# Altium PCB ring.PcbDoc
Units mm, origin at the board's own origin, x right, y up, seen from the top; angles counter-clockwise.
Board outline 210.25 x 210.25 mm, 2 copper layers (Top Layer, Bottom Layer); 227 components, 194 nets, 826 pads, 241 vias.
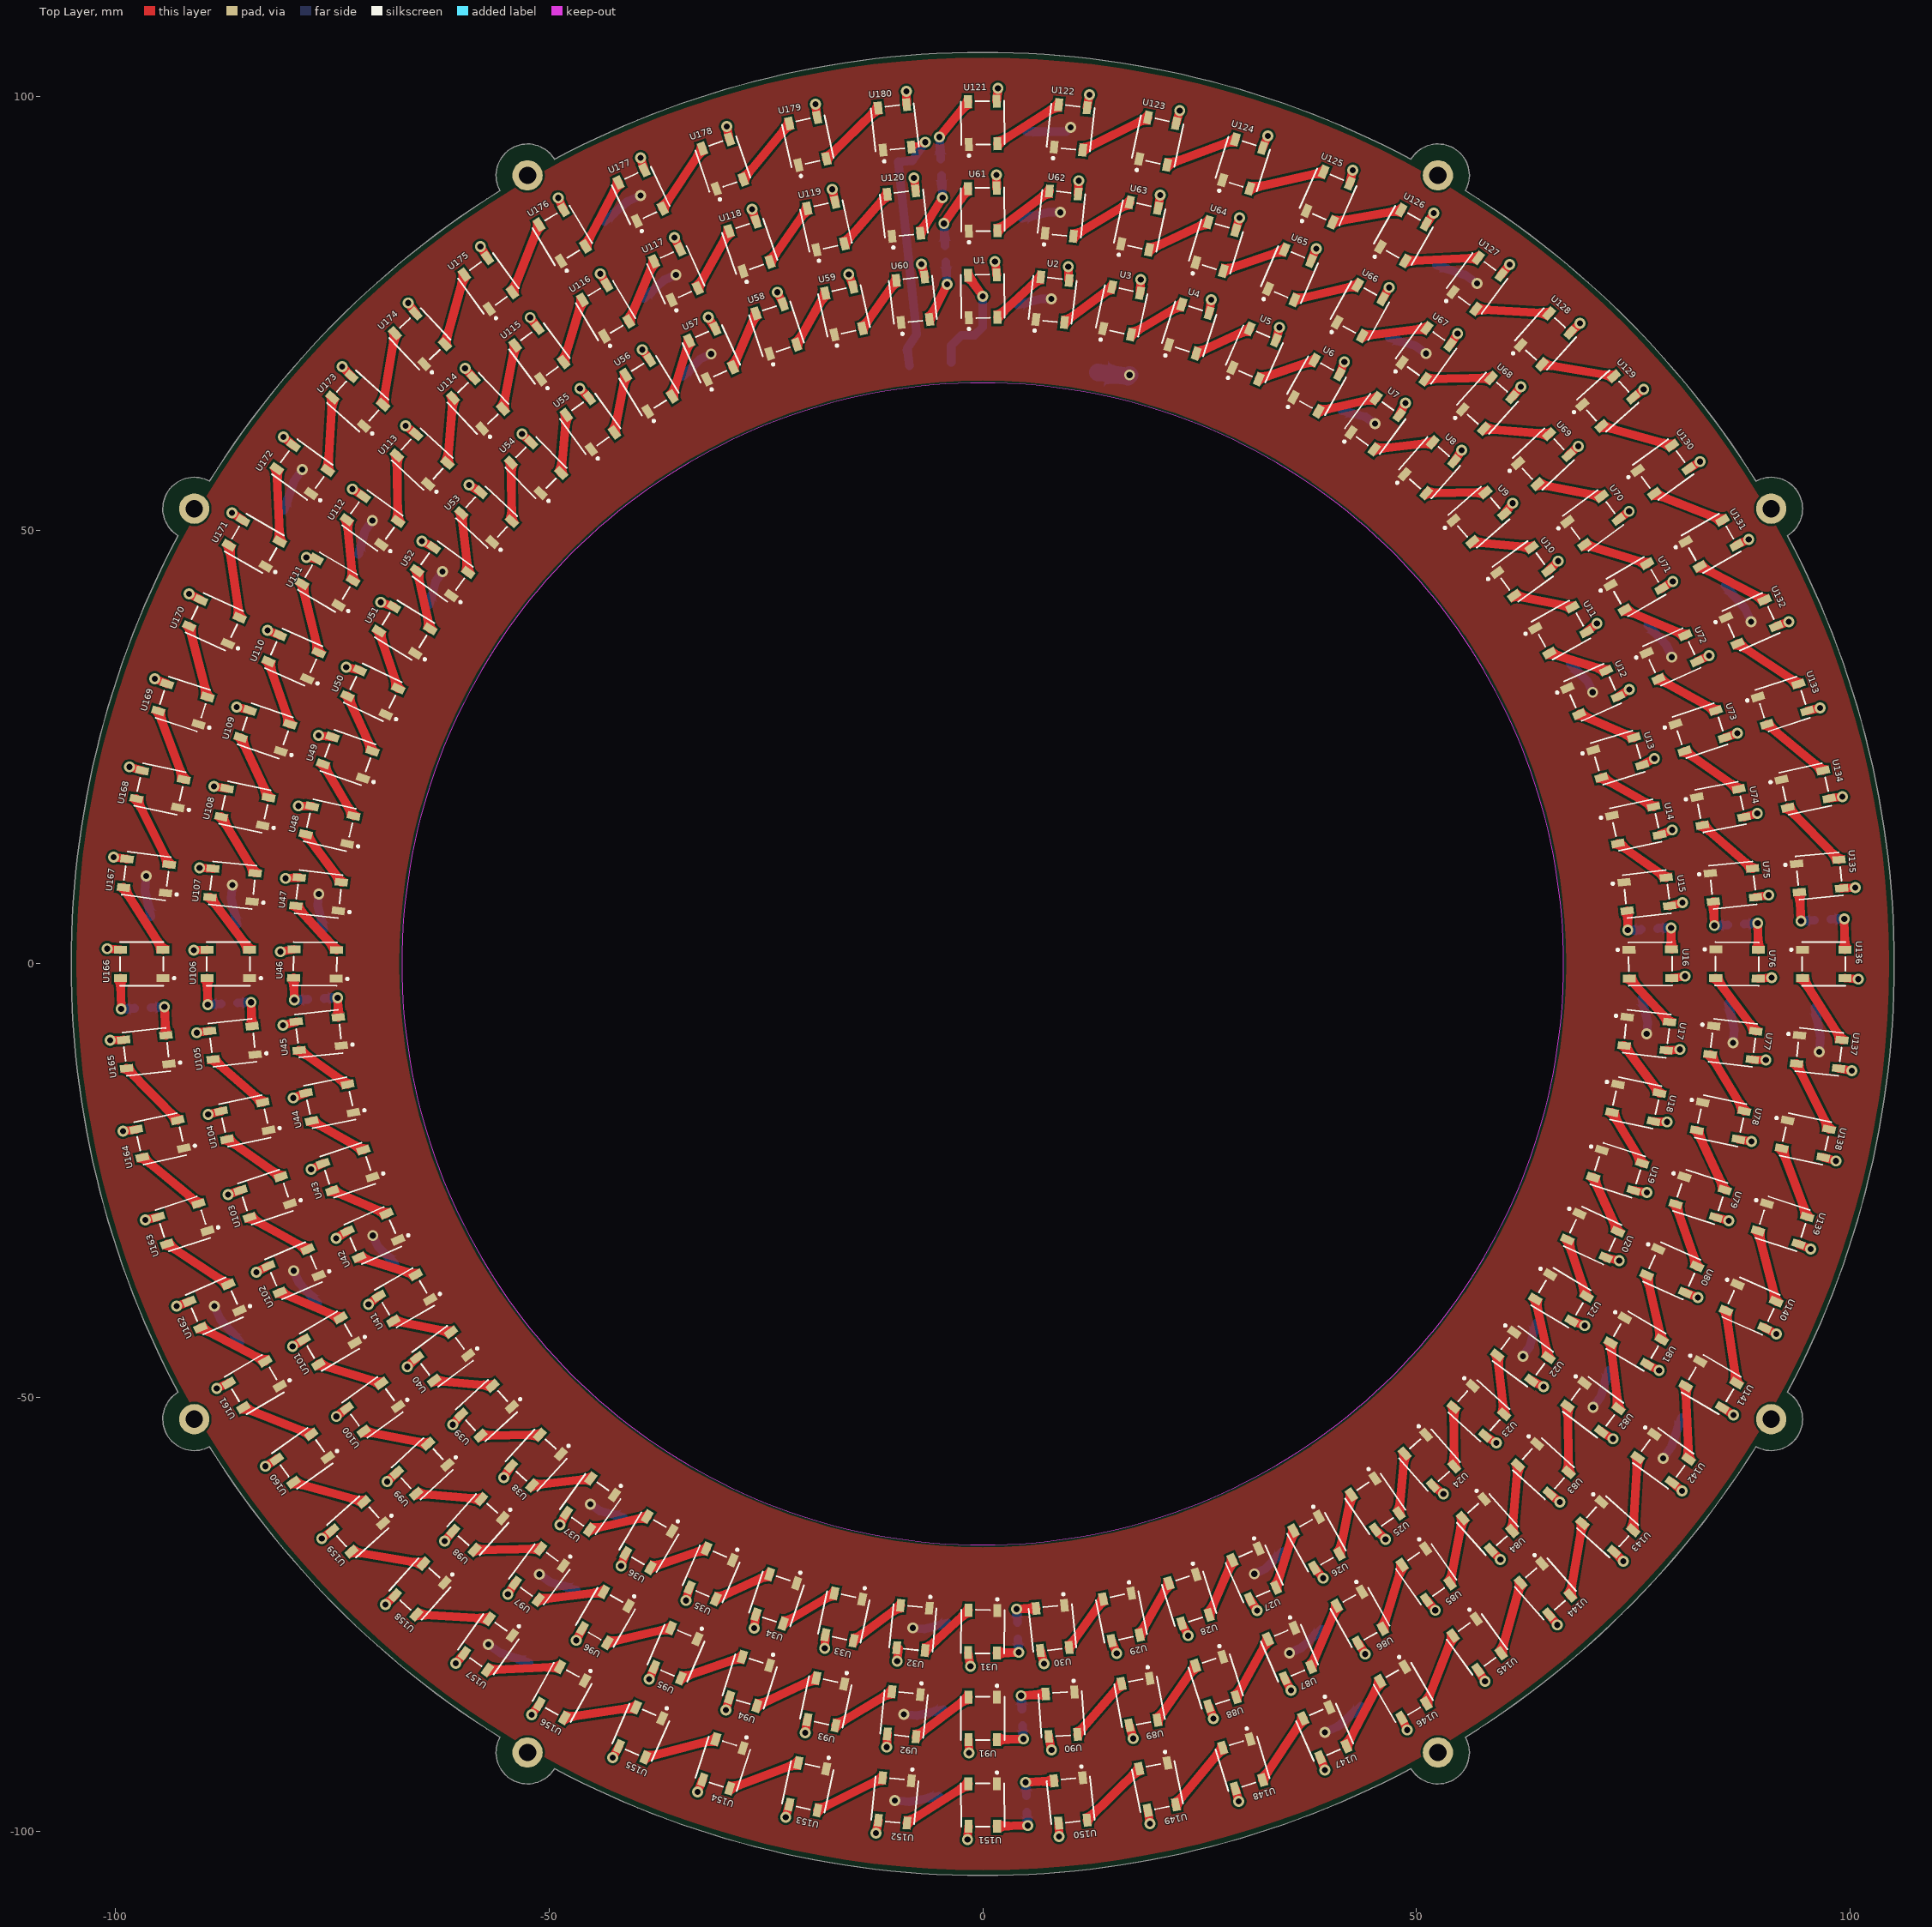
[diagram p0: Top Layer view]
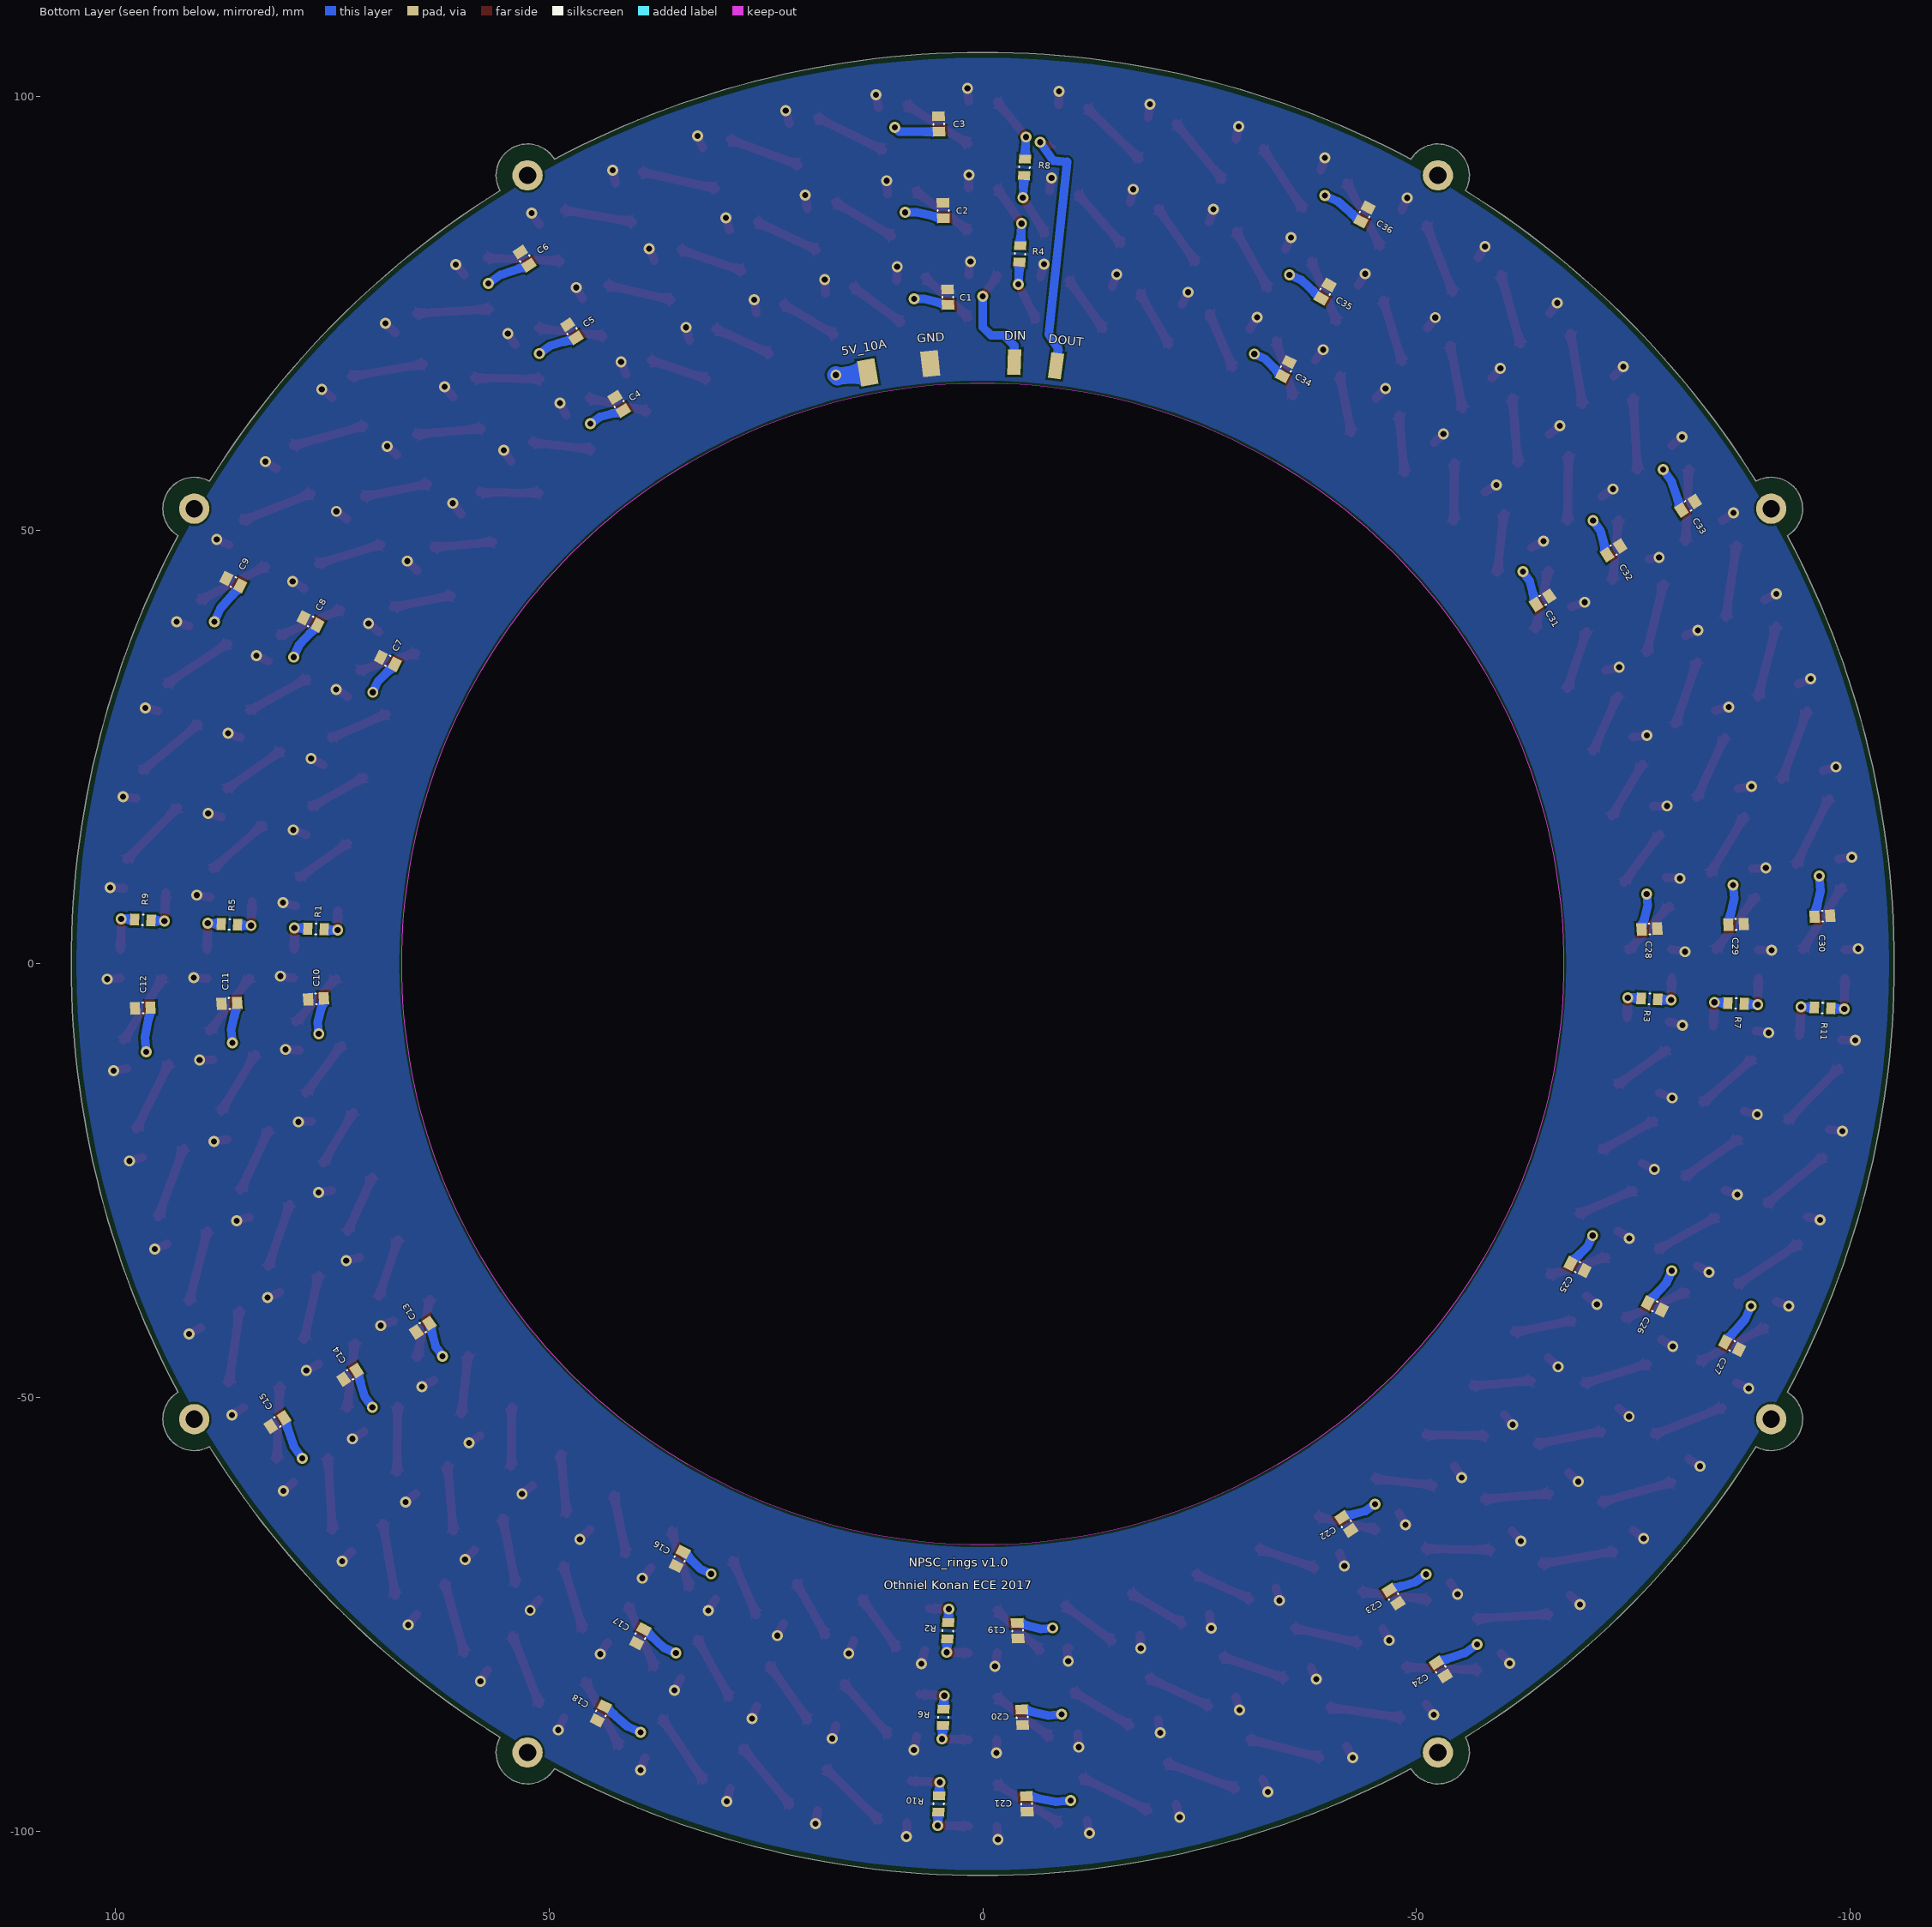
[diagram p1: Bottom Layer view, seen from below]
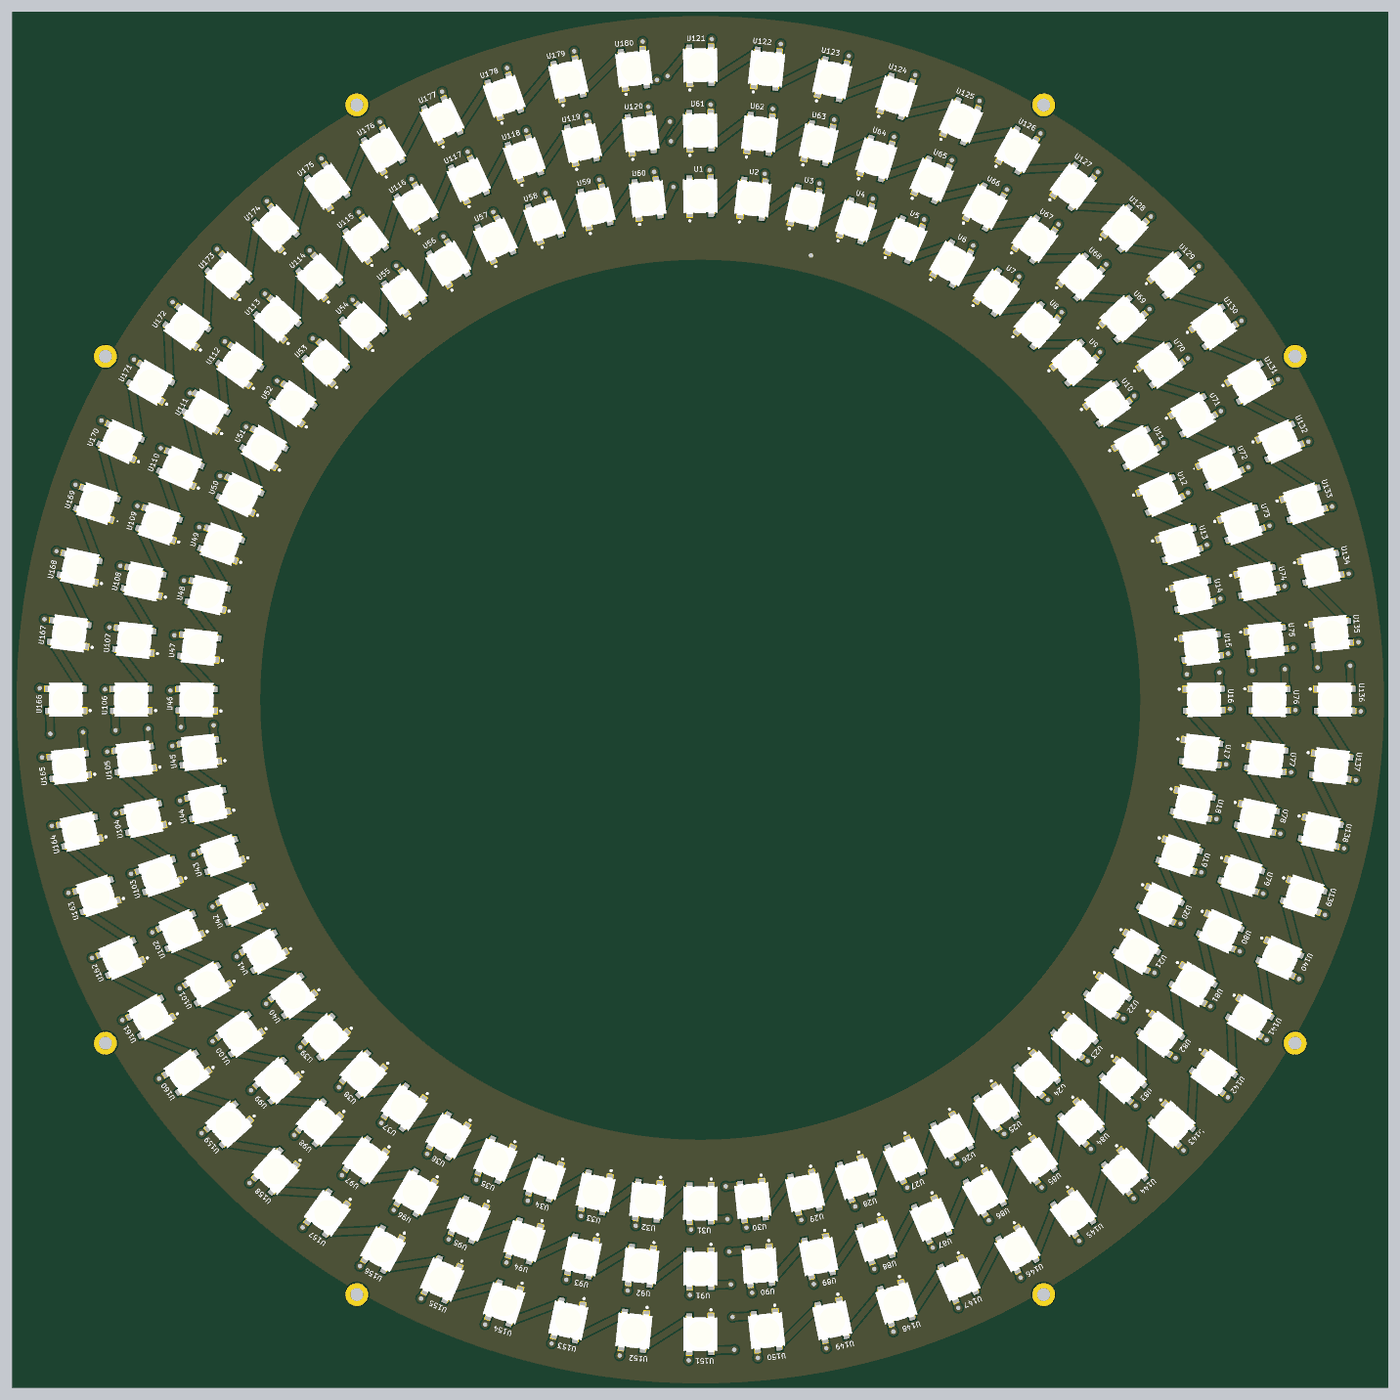
[diagram p2: 3D render of the assembled board from above, using the file's embedded part models]

## Layer stack, top to bottom
Top Solder: solder mask 0.0102, Solder Resist, Dk 3.5
Top Layer: signal copper 0.0356
Dielectric 1: dielectric 0.32, FR-4, Dk 4.8
Bottom Layer: signal copper 0.0356
Bottom Solder: solder mask 0.0102, Solder Resist, Dk 3.5

## Board outline
-55.675,-89.179 cw(c-55.564,-89.241) -55.673,-89.175 cw(c0,0) -89.175,-55.673 cw(c-90.933,-52.5) -92.802,-49.391 cw(c0,0) -92.802,49.391 cw(c-90.933,52.5) -89.179,55.675 cw(c-89.241,55.564) -89.175,55.673 cw(c0,0) -55.673,89.175 cw(c-55.564,89.241) -55.675,89.179 cw(c-52.5,90.933) -49.392,92.802 -49.391,92.802 cw(c0,0) 49.391,92.802 cw(c52.5,90.933) 56.127,90.933 cw(c52.5,90.933) 55.673,89.175 cw(c0,0) 89.175,55.673 cw(c90.933,52.5) 94.56,52.5 cw(c90.933,52.5) 92.802,49.391 cw(c0,0) 105.127,0 cw(c0,0) 92.802,-49.391 cw(c90.933,-52.5) 94.56,-52.5 cw(c90.933,-52.5) 89.169,-55.67 cw(c89.045,-55.642) 89.153,-55.709 cw(c0,0) 55.673,-89.175 cw(c52.5,-90.933) 56.127,-90.933 cw(c52.5,-90.933) 49.391,-92.802 cw(c0,0) -49.391,-92.802 cw(c-52.5,-90.933)
cut-out: -67,0 ccw(c0,0) 0,-67 ccw(c0,0) 67,0 ccw(c0,0) 0,67 ccw(c0,0)

## Design rules (kind name [scope] priority, off if disabled: settings)
Clearance Clearance_1 [InNamedPolygon('GND_L02_P023')] p1: gap=0.5 ignorepadtopadclearanceinfootprint=FALSE except(0: Arc-Hole Track-Hole SMDPad-Hole THPad-Hole Via-Hole Fill-Hole Poly-Hole Region-Hole Text-Hole)
Clearance [All] p2: gap=0.254 ignorepadtopadclearanceinfootprint=FALSE except(0: Arc-Hole Track-Hole SMDPad-Hole THPad-Hole Via-Hole Fill-Hole Poly-Hole Region-Hole Text-Hole)
PolygonConnect PolygonConnect_2 [All vs IsNamedPolygon('GND_L02_P023')] p1: connectstyle=Relief reliefconductorwidth=0.254 reliefentries=4 polygonreliefangle="45 Angle" airgapwidth=0.254
PolygonConnect PolygonConnect_1 [All vs IsNamedPolygon('GND_L02_P023')] p2: connectstyle=Relief reliefconductorwidth=0.254 reliefentries=4 polygonreliefangle="45 Angle" airgapwidth=0.254
PolygonConnect [All] p3: connectstyle=Direct reliefconductorwidth=0.254 reliefentries=4 polygonreliefangle="45 Angle" airgapwidth=0.254
RoomDefinition ring [InComponentClass('ring')] p1: confinementstyle=ConfineIn formatcopy=TRUE lockcomponents=FALSE outline -160,-154 156,-154 156,155 -160,155
RoutingVias [All] p1: holewidth=0.711 width=1.27 viastyle="Through Hole" minholewidth=0.711 minwidth=1.27 maxholewidth=0.711 maxwidth=1.27
SolderMaskExpansion [All] p1: expansion=0.102
Width [All] p1: maxlimit=4 minlimit=0.5 preferedwidth=1
30 further rules are at their usual default settings.

## Components (designator, comment, footprint, x,y, rotation, side; value= is the part's Value field where it differs from the comment)
C1 "100nF" CAPC0805(2012)100_N 4.03,76.894 r268.52 bottom
C2 "100nF" CAPC0805(2012)100_N 4.553,86.881 r268.5 bottom
C3 "100nF" CAPC0805(2012)100_N 5.077,96.867 r267.82 bottom
C4 "100nF" CAPC0805(2012)100_N 41.937,64.578 r238.24 bottom
C5 "100nF" CAPC0805(2012)100_N 47.384,72.964 r237.37 bottom
C6 "100nF" CAPC0805(2012)100_N 52.83,81.351 r236.78 bottom
C7 "100nF" CAPC0805(2012)100_N 68.608,34.957 r207.27 bottom
C8 "100nF" CAPC0805(2012)100_N 77.518,39.497 r207.5 bottom
C9 "100nF" CAPC0805(2012)100_N 86.428,44.037 r206.99 bottom
C10 "100nF" CAPC0805(2012)100_N 76.894,-4.03 r176.74 bottom
C11 "100nF" CAPC0805(2012)100_N 86.881,-4.553 r176.85 bottom
C12 "100nF" CAPC0805(2012)100_N 96.867,-5.077 r177.57 bottom
C13 "100nF" CAPC0805(2012)100_N 64.578,-41.937 r146.45 bottom
C14 "100nF" CAPC0805(2012)100_N 72.964,-47.384 r146.99 bottom
C15 "100nF" CAPC0805(2012)100_N 81.351,-52.83 r146.77 bottom
C16 "100nF" CAPC0805(2012)100_N 34.957,-68.608 r117.27 bottom
C17 "100nF" CAPC0805(2012)100_N 39.497,-77.518 r117.3 bottom
C18 "100nF" CAPC0805(2012)100_N 44.037,-86.428 r116.79 bottom
C19 "100nF" CAPC0805(2012)100_N -4.03,-76.894 r87.22 bottom
C20 "100nF" CAPC0805(2012)100_N -4.553,-86.881 r87.17 bottom
C21 "100nF" CAPC0805(2012)100_N -5.077,-96.867 r87.39 bottom
C22 "100nF" CAPC0805(2012)100_N -41.937,-64.578 r56.43 bottom
C23 "100nF" CAPC0805(2012)100_N -47.384,-72.964 r56.98 bottom
C24 "100nF" CAPC0805(2012)100_N -52.83,-81.351 r57.04 bottom
C25 "100nF" CAPC0805(2012)100_N -68.608,-34.957 r27.1 bottom
C26 "100nF" CAPC0805(2012)100_N -77.518,-39.497 r27.17 bottom
C27 "100nF" CAPC0805(2012)100_N -86.428,-44.037 r27.5 bottom
C28 "100nF" CAPC0805(2012)100_N -76.894,4.03 r356.81 bottom
C29 "100nF" CAPC0805(2012)100_N -86.881,4.553 r357.7 bottom
C30 "100nF" CAPC0805(2012)100_N -96.844,5.499 r356.71 bottom
C31 "100nF" CAPC0805(2012)100_N -64.578,41.937 r327.04 bottom
C32 "100nF" CAPC0805(2012)100_N -72.757,47.702 r326.59 bottom
C33 "100nF" CAPC0805(2012)100_N -81.351,52.83 r327.19 bottom
C34 "100nF" CAPC0805(2012)100_N -34.957,68.608 r296.76 bottom
C35 "100nF" CAPC0805(2012)100_N -39.497,77.518 r299.83 bottom
C36 "100nF" CAPC0805(2012)100_N -44.037,86.428 r296.96 bottom
R1 "Jumper 0805(2012)" RESC0805(2012)_N 76.894,4.03 r182.19 bottom
R2 "Jumper 0805(2012)" RESC0805(2012)_N 4.03,-76.894 r92.52 bottom
R3 "Jumper 0805(2012)" RESC0805(2012)_N -76.894,-4.03 r3.18 bottom
R4 "Jumper 0805(2012)" RESC0805(2012)_N -4.292,81.888 r93 bottom
R5 "Jumper 0805(2012)" RESC0805(2012)_N 86.881,4.553 r182.47 bottom
R6 "Jumper 0805(2012)" RESC0805(2012)_N 4.553,-86.881 r91.98 bottom
R7 "Jumper 0805(2012)" RESC0805(2012)_N -86.881,-4.553 r2.5 bottom
R8 "Jumper 0805(2012)" RESC0805(2012)_N -4.815,91.874 r93 bottom
R9 "Jumper 0805(2012)" RESC0805(2012)_N 96.867,5.077 r183 bottom
R10 "Jumper 0805(2012)" RESC0805(2012)_N 5.077,-96.867 r92.02 bottom
R11 "Jumper 0805(2012)" RESC0805(2012)_N -96.867,-5.077 r2.68 bottom
U1 "WS2812B" ADAI-WS2812B_V 0,77 r90.93 top
U2 "WS2812B" ADAI-WS2812B_V 8.049,76.578 r83.5 top
U3 "WS2812B" ADAI-WS2812B_V 16.009,75.317 r77.81 top
U4 "WS2812B" ADAI-WS2812B_V 23.794,73.231 r72.15 top
U5 "WS2812B" ADAI-WS2812B_V 31.319,70.343 r66.14 top
U6 "WS2812B" ADAI-WS2812B_V 38.5,66.684 r60.53 top
U7 "WS2812B" ADAI-WS2812B_V 45.259,62.294 r53.69 top
U8 "WS2812B" ADAI-WS2812B_V 51.523,57.222 r48.64 top
U9 "WS2812B" ADAI-WS2812B_V 57.222,51.523 r41.12 top
U10 "WS2812B" ADAI-WS2812B_V 62.294,45.259 r36.08 top
U11 "WS2812B" ADAI-WS2812B_V 66.684,38.5 r29.43 top
U12 "WS2812B" ADAI-WS2812B_V 70.343,31.319 r24.13 top
U13 "WS2812B" ADAI-WS2812B_V 73.231,23.794 r16.94 top
U14 "WS2812B" ADAI-WS2812B_V 75.317,16.009 r11.74 top
U15 "WS2812B" ADAI-WS2812B_V 76.578,8.049 r6.5 top
U16 "WS2812B" ADAI-WS2812B_V 77,0 r0.5 top
U17 "WS2812B" ADAI-WS2812B_V 76.578,-8.049 r353.5 top
U18 "WS2812B" ADAI-WS2812B_V 75.317,-16.009 r348 top
U19 "WS2812B" ADAI-WS2812B_V 73.231,-23.794 r342 top
U20 "WS2812B" ADAI-WS2812B_V 70.343,-31.319 r335 top
U21 "WS2812B" ADAI-WS2812B_V 66.684,-38.5 r329 top
U22 "WS2812B" ADAI-WS2812B_V 62.294,-45.259 r323.5 top
U23 "WS2812B" ADAI-WS2812B_V 57.222,-51.523 r318 top
U24 "WS2812B" ADAI-WS2812B_V 51.523,-57.222 r311.5 top
U25 "WS2812B" ADAI-WS2812B_V 45.259,-62.294 r304.5 top
U26 "WS2812B" ADAI-WS2812B_V 38.5,-66.684 r299 top
U27 "WS2812B" ADAI-WS2812B_V 31.319,-70.343 r294 top
U28 "WS2812B" ADAI-WS2812B_V 23.794,-73.231 r287.5 top
U29 "WS2812B" ADAI-WS2812B_V 16.009,-75.317 r281.5 top
U30 "WS2812B" ADAI-WS2812B_V 8.049,-76.578 r276 top
U31 "WS2812B" ADAI-WS2812B_V 0,-77 r269.5 top
U32 "WS2812B" ADAI-WS2812B_V -8.049,-76.578 r264.5 top
U33 "WS2812B" ADAI-WS2812B_V -16.009,-75.317 r258 top
U34 "WS2812B" ADAI-WS2812B_V -23.794,-73.231 r251.5 top
U35 "WS2812B" ADAI-WS2812B_V -31.319,-70.343 r246.5 top
U36 "WS2812B" ADAI-WS2812B_V -38.5,-66.684 r239.5 top
U37 "WS2812B" ADAI-WS2812B_V -45.259,-62.294 r234.5 top
U38 "WS2812B" ADAI-WS2812B_V -51.523,-57.222 r227.5 top
U39 "WS2812B" ADAI-WS2812B_V -57.222,-51.523 r222.5 top
U40 "WS2812B" ADAI-WS2812B_V -62.294,-45.259 r216.77 top
U41 "WS2812B" ADAI-WS2812B_V -66.684,-38.5 r210 top
U42 "WS2812B" ADAI-WS2812B_V -70.343,-31.319 r204 top
U43 "WS2812B" ADAI-WS2812B_V -73.231,-23.794 r198.5 top
U44 "WS2812B" ADAI-WS2812B_V -75.317,-16.009 r191.5 top
U45 "WS2812B" ADAI-WS2812B_V -76.578,-8.049 r186 top
U46 "WS2812B" ADAI-WS2812B_V -77,0 r179 top
U47 "WS2812B" ADAI-WS2812B_V -76.578,8.049 r173.5 top
U48 "WS2812B" ADAI-WS2812B_V -75.317,16.009 r167 top
U49 "WS2812B" ADAI-WS2812B_V -73.231,23.794 r160.5 top
U50 "WS2812B" ADAI-WS2812B_V -70.343,31.319 r154.5 top
U51 "WS2812B" ADAI-WS2812B_V -66.684,38.5 r148.5 top
U52 "WS2812B" ADAI-WS2812B_V -62.294,45.259 r144 top
U53 "WS2812B" ADAI-WS2812B_V -57.222,51.523 r137 top
U54 "WS2812B" ADAI-WS2812B_V -51.523,57.222 r134.5 top
U55 "WS2812B" ADAI-WS2812B_V -45.259,62.294 r126 top
U56 "WS2812B" ADAI-WS2812B_V -38.5,66.684 r121.5 top
U57 "WS2812B" ADAI-WS2812B_V -31.319,70.343 r114.5 top
U58 "WS2812B" ADAI-WS2812B_V -23.794,73.231 r108.5 top
U59 "WS2812B" ADAI-WS2812B_V -16.009,75.317 r102.5 top
U60 "WS2812B" ADAI-WS2812B_V -8.049,76.578 r96.5 top
U61 "WS2812B" ADAI-WS2812B_V 0,87 r91 top
U62 "WS2812B" ADAI-WS2812B_V 9.094,86.523 r84 top
U63 "WS2812B" ADAI-WS2812B_V 18.088,85.099 r78 top
U64 "WS2812B" ADAI-WS2812B_V 26.884,82.742 r73 top
U65 "WS2812B" ADAI-WS2812B_V 35.386,79.478 r67 top
U66 "WS2812B" ADAI-WS2812B_V 43.5,75.344 r61 top
U67 "WS2812B" ADAI-WS2812B_V 51.137,70.384 r54 top
U68 "WS2812B" ADAI-WS2812B_V 58.214,64.654 r48 top
U69 "WS2812B" ADAI-WS2812B_V 64.654,58.214 r43 top
U70 "WS2812B" ADAI-WS2812B_V 70.384,51.137 r36.5 top
U71 "WS2812B" ADAI-WS2812B_V 75.344,43.5 r30 top
U72 "WS2812B" ADAI-WS2812B_V 79.478,35.386 r24.5 top
U73 "WS2812B" ADAI-WS2812B_V 82.742,26.884 r18.5 top
U74 "WS2812B" ADAI-WS2812B_V 85.099,18.088 r11 top
U75 "WS2812B" ADAI-WS2812B_V 86.523,9.094 r6 top
U76 "WS2812B" ADAI-WS2812B_V 87,0 r359.5 top
U77 "WS2812B" ADAI-WS2812B_V 86.523,-9.094 r353 top
U78 "WS2812B" ADAI-WS2812B_V 85.099,-18.088 r348 top
U79 "WS2812B" ADAI-WS2812B_V 82.742,-26.884 r342 top
U80 "WS2812B" ADAI-WS2812B_V 79.478,-35.386 r335.75 top
U81 "WS2812B" ADAI-WS2812B_V 75.344,-43.5 r329.5 top
U82 "WS2812B" ADAI-WS2812B_V 70.384,-51.137 r323 top
U83 "WS2812B" ADAI-WS2812B_V 64.654,-58.214 r318 top
U84 "WS2812B" ADAI-WS2812B_V 58.214,-64.654 r311.5 top
U85 "WS2812B" ADAI-WS2812B_V 51.137,-70.384 r305 top
U86 "WS2812B" ADAI-WS2812B_V 43.5,-75.344 r299.43 top
U87 "WS2812B" ADAI-WS2812B_V 35.386,-79.478 r293 top
U88 "WS2812B" ADAI-WS2812B_V 26.884,-82.742 r288 top
U89 "WS2812B" ADAI-WS2812B_V 18.088,-85.099 r280.5 top
U90 "WS2812B" ADAI-WS2812B_V 9.094,-86.523 r274 top
U91 "WS2812B" ADAI-WS2812B_V 0,-87 r270 top
U92 "WS2812B" ADAI-WS2812B_V -9.094,-86.523 r264.03 top
U93 "WS2812B" ADAI-WS2812B_V -18.088,-85.099 r258 top
U94 "WS2812B" ADAI-WS2812B_V -26.884,-82.742 r252.5 top
U95 "WS2812B" ADAI-WS2812B_V -35.386,-79.478 r247 top
U96 "WS2812B" ADAI-WS2812B_V -43.5,-75.344 r240 top
U97 "WS2812B" ADAI-WS2812B_V -51.137,-70.384 r233.5 top
U98 "WS2812B" ADAI-WS2812B_V -58.214,-64.654 r228.5 top
U99 "WS2812B" ADAI-WS2812B_V -64.654,-58.214 r222.5 top
U100 "WS2812B" ADAI-WS2812B_V -70.384,-51.137 r216 top
U101 "WS2812B" ADAI-WS2812B_V -75.344,-43.5 r210.5 top
U102 "WS2812B" ADAI-WS2812B_V -79.478,-35.386 r203 top
U103 "WS2812B" ADAI-WS2812B_V -82.742,-26.884 r198.5 top
U104 "WS2812B" ADAI-WS2812B_V -85.099,-18.088 r192 top
U105 "WS2812B" ADAI-WS2812B_V -86.523,-9.094 r186.5 top
U106 "WS2812B" ADAI-WS2812B_V -87,0 r180 top
U107 "WS2812B" ADAI-WS2812B_V -86.523,9.094 r174 top
U108 "WS2812B" ADAI-WS2812B_V -85.099,18.088 r168 top
U109 "WS2812B" ADAI-WS2812B_V -82.742,26.884 r161 top
U110 "WS2812B" ADAI-WS2812B_V -79.478,35.386 r156 top
U111 "WS2812B" ADAI-WS2812B_V -75.571,44.031 r149.5 top
U112 "WS2812B" ADAI-WS2812B_V -70.384,51.137 r144 top
U113 "WS2812B" ADAI-WS2812B_V -64.654,58.214 r137.5 top
U114 "WS2812B" ADAI-WS2812B_V -58.214,64.654 r133.5 top
U115 "WS2812B" ADAI-WS2812B_V -51.137,70.384 r127 top
U116 "WS2812B" ADAI-WS2812B_V -43.5,75.344 r121 top
U117 "WS2812B" ADAI-WS2812B_V -35.386,79.478 r114.5 top
U118 "WS2812B" ADAI-WS2812B_V -26.884,82.742 r109 top
U119 "WS2812B" ADAI-WS2812B_V -18.088,85.099 r102.5 top
U120 "WS2812B" ADAI-WS2812B_V -9.094,86.523 r96.5 top
U121 "WS2812B" ADAI-WS2812B_V 0,97 r91 top
U122 "WS2812B" ADAI-WS2812B_V 10.139,96.469 r84 top
U123 "WS2812B" ADAI-WS2812B_V 20.167,94.88 r78 top
U124 "WS2812B" ADAI-WS2812B_V 29.975,92.252 r72.5 top
U125 "WS2812B" ADAI-WS2812B_V 39.84,88.441 r66.25 top
U126 "WS2812B" ADAI-WS2812B_V 48.5,84.004 r60.5 top
U127 "WS2812B" ADAI-WS2812B_V 57.015,78.475 r53.5 top
U128 "WS2812B" ADAI-WS2812B_V 64.906,72.085 r48 top
U129 "WS2812B" ADAI-WS2812B_V 72.085,64.906 r42 top
U130 "WS2812B" ADAI-WS2812B_V 78.475,57.015 r36 top
U131 "WS2812B" ADAI-WS2812B_V 84.004,48.5 r30 top
U132 "WS2812B" ADAI-WS2812B_V 88.614,39.453 r24.11 top
U133 "WS2812B" ADAI-WS2812B_V 92.252,29.975 r18 top
U134 "WS2812B" ADAI-WS2812B_V 94.88,20.167 r12.5 top
U135 "WS2812B" ADAI-WS2812B_V 96.469,10.139 r5.5 top
U136 "WS2812B" ADAI-WS2812B_V 97,0 r0 top
U137 "WS2812B" ADAI-WS2812B_V 96.469,-10.139 r353.5 top
U138 "WS2812B" ADAI-WS2812B_V 94.88,-20.167 r348 top
U139 "WS2812B" ADAI-WS2812B_V 92.252,-29.975 r342 top
U140 "WS2812B" ADAI-WS2812B_V 88.614,-39.453 r335.99 top
U141 "WS2812B" ADAI-WS2812B_V 84.004,-48.5 r329.5 top
U142 "WS2812B" ADAI-WS2812B_V 78.475,-57.015 r324 top
U143 "WS2812B" ADAI-WS2812B_V 72.085,-64.906 r318 top
U144 "WS2812B" ADAI-WS2812B_V 64.906,-72.085 r311.5 top
U145 "WS2812B" ADAI-WS2812B_V 57.015,-78.475 r306 top
U146 "WS2812B" ADAI-WS2812B_V 48.5,-84.004 r300.24 top
U147 "WS2812B" ADAI-WS2812B_V 39.453,-88.614 r293.5 top
U148 "WS2812B" ADAI-WS2812B_V 29.975,-92.252 r287 top
U149 "WS2812B" ADAI-WS2812B_V 20.167,-94.88 r281.5 top
U150 "WS2812B" ADAI-WS2812B_V 10.139,-96.469 r276 top
U151 "WS2812B" ADAI-WS2812B_V 0,-97 r270.11 top
U152 "WS2812B" ADAI-WS2812B_V -10.139,-96.469 r264.28 top
U153 "WS2812B" ADAI-WS2812B_V -20.167,-94.88 r258 top
U154 "WS2812B" ADAI-WS2812B_V -29.975,-92.252 r252 top
U155 "WS2812B" ADAI-WS2812B_V -39.453,-88.614 r246.5 top
U156 "WS2812B" ADAI-WS2812B_V -48.5,-84.004 r241 top
U157 "WS2812B" ADAI-WS2812B_V -57.015,-78.475 r234.5 top
U158 "WS2812B" ADAI-WS2812B_V -64.906,-72.085 r228 top
U159 "WS2812B" ADAI-WS2812B_V -72.085,-64.906 r222 top
U160 "WS2812B" ADAI-WS2812B_V -78.475,-57.015 r215.5 top
U161 "WS2812B" ADAI-WS2812B_V -84.004,-48.5 r210.5 top
U162 "WS2812B" ADAI-WS2812B_V -88.614,-39.453 r203.5 top
U163 "WS2812B" ADAI-WS2812B_V -92.252,-29.975 r198 top
U164 "WS2812B" ADAI-WS2812B_V -94.88,-20.167 r192.5 top
U165 "WS2812B" ADAI-WS2812B_V -96.469,-10.139 r186 top
U166 "WS2812B" ADAI-WS2812B_V -97,0 r180 top
U167 "WS2812B" ADAI-WS2812B_V -96.469,10.139 r172.5 top
U168 "WS2812B" ADAI-WS2812B_V -94.88,20.167 r168 top
U169 "WS2812B" ADAI-WS2812B_V -92.252,29.975 r162 top
U170 "WS2812B" ADAI-WS2812B_V -88.614,39.453 r155.5 top
U171 "WS2812B" ADAI-WS2812B_V -84.004,48.5 r150 top
U172 "WS2812B" ADAI-WS2812B_V -78.475,57.015 r144 top
U173 "WS2812B" ADAI-WS2812B_V -72.085,64.906 r138 top
U174 "WS2812B" ADAI-WS2812B_V -64.906,72.085 r133.5 top
U175 "WS2812B" ADAI-WS2812B_V -57.015,78.475 r126 top
U176 "WS2812B" ADAI-WS2812B_V -48.5,84.004 r121 top
U177 "WS2812B" ADAI-WS2812B_V -39.453,88.614 r115.5 top
U178 "WS2812B" ADAI-WS2812B_V -29.975,92.252 r109 top
U179 "WS2812B" ADAI-WS2812B_V -20.167,94.88 r102.5 top
U180 "WS2812B" ADAI-WS2812B_V -10.139,96.469 r96.5 top

## Footprints (in the part's own frame and the unit in brackets; to place one, negate y for a bottom-side part, rotate by r counter-clockwise, add the part's x,y. Pads: shape width x height; smd on the part's side, far side on the other; paste and mask are expansions set on the pad)
ADAI-WS2812B_V [mm] "SMD, 4-Leads, Body 5x5mm, Pitch 3.3mm"
  rect 1.5x0.9 smd: 1(-2.45,1.65) 2(-2.45,-1.65) 3(2.45,-1.65) 4(2.45,1.65)
  silkscreen extent -3.87,-2.5 2.5,2.5, body extent -2.7,-2.5 2.7,2.5, height 1.69
CAPC0805(2012)100_N [mm] "Chip Capacitor, Body 2.0x1.2mm, Height 1.0mm, IPC Medium Density"
  rect 1.15x1.45 smd: 1(-0.9,0) 2(0.9,0)
  silkscreen extent -0.05,-0.63 0.05,0.63, body extent -1.1,-0.73 1.1,0.73, height 1
RESC0805(2012)_N [mm] "Chip Resistor, Body 2.0x1.3mm, IPC Medium Density"
  rect 1.05x1.4 smd: 1(-0.95,0) 2(0.95,0)
  silkscreen extent -0.05,-0.6 0.05,0.6, body extent -1.1,-0.67 1.1,0.68, height 0.7

## Part data
C1 C2 C3 C4 C5 C6 C7 C8 C9 C10 C11 C12 C13 C14 C15 C16 C17 C18 C19 C20 C21 C22 C23 C24 C25 C26 C27 C28 C29 C30 C31 C32 C33 C34 C35 C36: library part CMP-1036-04396-1, "CAP 100nF 10V ±20% 0805 (2012 Metric) Thickness 1mm SMD"
R1 R2 R3 R4 R5 R6 R7 R8 R9 R10 R11: library part CMP-1013-00001-1, "Jumper 0805 (2012 Metric)"
U1 U2 U3 U4 U5 U6 U7 U8 U9 U10 U11 U12 U13 U14 U15 U16 U17 U18 U19 U20 U21 U22 U23 U24 U25 U26 U27 U28 U29 U30 U31 U32 U33 U34 U35 U36 U37 U38 U39 U40 U41 U42 U43 U44 U45 U46 U47 U48 U49 U50 U51 U52 U53 U54 U55 U56 U57 U58 U59 U60 U61 U62 U63 U64 U65 U66 U67 U68 U69 U70 U71 U72 U73 U74 U75 U76 U77 U78 U79 U80 U81 U82 U83 U84 U85 U86 U87 U88 U89 U90 U91 U92 U93 U94 U95 U96 U97 U98 U99 U100 U101 U102 U103 U104 U105 U106 U107 U108 U109 U110 U111 U112 U113 U114 U115 U116 U117 U118 U119 U120 U121 U122 U123 U124 U125 U126 U127 U128 U129 U130 U131 U132 U133 U134 U135 U136 U137 U138 U139 U140 U141 U142 U143 U144 U145 U146 U147 U148 U149 U150 U151 U152 U153 U154 U155 U156 U157 U158 U159 U160 U161 U162 U163 U164 U165 U166 U167 U168 U169 U170 U171 U172 U173 U174 U175 U176 U177 U178 U179 U180: library part CMP-1740-00005-1, "Intelligent Control LED Integrated Light Source, 3.5 to 5.3 V, -25 to 80 degC, 4-Pin SMD, RoHS, Bulk"

## Free pads (board coordinates)
  rect 3x2 smd far side rot 80: 1(13.261,68.223)
  round 3.5 hole 2: 1(52.5,90.933) 2(90.933,52.5) 3(90.933,-52.5) 4(52.5,-90.933) 5(-52.5,-90.933) 6(-90.933,-52.5) 7(-90.933,52.5) 8(-52.5,90.933)
  rect 3x2 smd far side rot 84: 2(6.057,69.236)
  rect 3x1.5 smd far side rot 92: 3(-3.637,69.405)
  rect 3x1.5 smd far side rot 98: 4(-8.47,68.982)

## Via types
v1: diameter 1.27, hole 0.711, Top Layer to Bottom Layer, tented both sides, 240 vias
v2: diameter 1.27, hole 0.711, Top Layer to Bottom Layer, tented top, 1 vias

## Nets (pads, with @x,y where several pads share a name; then routed paths per layer and width w, separated by ;. In a path a pad name is that pad's centre, name@x,y a point inside that pad or via, vN(x,y) a via of type N, cw(c..) or ccw(c..) an arc to the next point about the centre after c; other vN are vias at no path point)
5V: C1.2 C2.2 C3.2 C4.2 C5.2 C6.2 C7.2 C8.2 C9.2 C10.2 C11.2 C12.2 C13.2 C14.2 C15.2 C16.2 C17.2 C18.2 C19.2 C20.2 C21.2 C22.2 C23.2 C24.2 C25.2 C26.2 C27.2 C28.2 C29.2 C30.2 C31.2 C32.2 C33.2 C34.2 C35.2 C36.2 pad.1@13.261,68.223 U1.1 U2.1 U3.1 U4.1 U5.1 U6.1 U7.1 U8.1 U9.1 U10.1 U11.1 U12.1 U13.1 U14.1 U15.1 U16.1 U17.1 U18.1 U19.1 U20.1 U21.1 U22.1 U23.1 U24.1 U25.1 U26.1 U27.1 U28.1 U29.1 U30.1 U31.1 U32.1 U33.1 U34.1 U35.1 U36.1 U37.1 U38.1 U39.1 U40.1 U41.1 U42.1 U43.1 U44.1 U45.1 U46.1 U47.1 U48.1 U49.1 U50.1 U51.1 U52.1 U53.1 U54.1 U55.1 U56.1 U57.1 U58.1 U59.1 U60.1 U61.1 U62.1 U63.1 U64.1 U65.1 U66.1 U67.1 U68.1 U69.1 U70.1 U71.1 U72.1 U73.1 U74.1 U75.1 U76.1 U77.1 U78.1 U79.1 U80.1 U81.1 U82.1 U83.1 U84.1 U85.1 U86.1 U87.1 U88.1 U89.1 U90.1 U91.1 U92.1 U93.1 U94.1 U95.1 U96.1 U97.1 U98.1 U99.1 U100.1 U101.1 U102.1 U103.1 U104.1 U105.1 U106.1 U107.1 U108.1 U109.1 U110.1 U111.1 U112.1 U113.1 U114.1 U115.1 U116.1 U117.1 U118.1 U119.1 U120.1 U121.1 U122.1 U123.1 U124.1 U125.1 U126.1 U127.1 U128.1 U129.1 U130.1 U131.1 U132.1 U133.1 U134.1 U135.1 U136.1 U137.1 U138.1 U139.1 U140.1 U141.1 U142.1 U143.1 U144.1 U145.1 U146.1 U147.1 U148.1 U149.1 U150.1 U151.1 U152.1 U153.1 U154.1 U155.1 U156.1 U157.1 U158.1 U159.1 U160.1 U161.1 U162.1 U163.1 U164.1 U165.1 U166.1 U167.1 U168.1 U169.1 U170.1 U171.1 U172.1 U173.1 U174.1 U175.1 U176.1 U177.1 U178.1 U179.1 U180.1 | length 170.9
  Bottom Layer w1: v1(-96.469,10.139) -96.631,8.454 C30.2 ; v1(-88.614,-39.453) -87.912,-40.994 C27.2 ; v1(-86.523,9.094) -86.669,7.583 C29.2 ; C33.2 -79.458,55.637 v1(-78.475,57.015) ; v1(-79.478,-35.386) -78.849,-36.768 C26.2 ; v1(-76.578,8.049) -76.707,6.711 C28.2 ; C32.2 -71.266,49.901 v1(-70.384,51.137) ; v1(-70.343,-31.319) -69.786,-32.542 C25.2 ; C31.2 -63.075,44.165 v1(-62.294,45.259) ; v1(-57.015,-78.475) -55.637,-79.458 C24.2 ; v1(-51.137,-70.384) -49.901,-71.266 C23.2 ; v1(-45.259,-62.294) -44.165,-63.075 C22.2 ; C36.2 -40.994,87.912 v1(-39.453,88.614) ; C35.2 -36.768,78.849 v1(-35.386,79.478) ; C34.2 -32.542,69.786 v1(-31.319,70.343) ; v1(-10.139,-96.469) -8.454,-96.631 C21.2 ; v1(-9.094,-86.523) -7.583,-86.669 C20.2 ; v1(-8.049,-76.578) -6.711,-76.707 C19.2 ; C1.2 6.711,76.707 v1(7.92,76.707) ; C2.2 7.583,86.669 v1(8.948,86.669) ; C3.2 9.638,95.968 v1(10.139,96.469) ; v1(31.319,-70.343) 32.542,-69.786 C16.2 ; v1(35.386,-79.478) 36.768,-78.849 C17.2 ; v1(39.453,-88.614) 40.994,-87.912 C18.2 ; C4.2 44.165,63.075 v1(45.259,62.294) ; C5.2 49.901,71.266 v1(51.137,70.384) ; C6.2 55.637,79.458 v1(57.015,78.475) ; v1(62.294,-45.259) 63.075,-44.165 C13.2 ; C7.2 69.786,32.542 v1(70.343,31.319) ; v1(70.384,-51.137) 71.266,-49.901 C14.2 ; C10.2 76.707,-6.711 v1(76.578,-8.049) ; C8.2 78.849,36.768 v1(79.478,35.386) ; v1(78.475,-57.015) 79.458,-55.637 C15.2 ; C9.2 87.912,40.994 v1(88.614,39.453) ; C11.2 86.669,-7.583 v1(86.523,-9.094) ; C12.2 96.631,-8.454 v1(96.469,-10.139)
  Bottom Layer w2: pad.1@13.261,68.223 16.746,67.732 v2(16.935,67.921)
Din: pad.3@-3.637,69.405 U1.4 | length 12.9
  Top Layer w1: U1.4 v1(0,77)
  Bottom Layer w1: pad.3@-3.637,69.405 -3.637,71.297 -2.446,72.489 -0.951,72.489 0,73.44 v1(0,77)
Dout: pad.4@-8.47,68.982 U180.2 | length 29.9
  Top Layer w0.5: U180.2 v1(-6.627,94.769)
  Bottom Layer w1: pad.4@-8.47,68.982 -8.714,70.967 -7.631,72.6 -9.721,92.49 -8.105,92.646 v1(-6.627,94.769)
GND: C1.1 C2.1 C3.1 C4.1 C5.1 C6.1 C7.1 C8.1 C9.1 C10.1 C11.1 C12.1 C13.1 C14.1 C15.1 C16.1 C17.1 C18.1 C19.1 C20.1 C21.1 C22.1 C23.1 C24.1 C25.1 C26.1 C27.1 C28.1 C29.1 C30.1 C31.1 C32.1 C33.1 C34.1 C35.1 C36.1 pad.2@6.057,69.236 U1.3 U2.3 U3.3 U4.3 U5.3 U6.3 U7.3 U8.3 U9.3 U10.3 U11.3 U12.3 U13.3 U14.3 U15.3 U16.3 U17.3 U18.3 U19.3 U20.3 U21.3 U22.3 U23.3 U24.3 U25.3 U26.3 U27.3 U28.3 U29.3 U30.3 U31.3 U32.3 U33.3 U34.3 U35.3 U36.3 U37.3 U38.3 U39.3 U40.3 U41.3 U42.3 U43.3 U44.3 U45.3 U46.3 U47.3 U48.3 U49.3 U50.3 U51.3 U52.3 U53.3 U54.3 U55.3 U56.3 U57.3 U58.3 U59.3 U60.3 U61.3 U62.3 U63.3 U64.3 U65.3 U66.3 U67.3 U68.3 U69.3 U70.3 U71.3 U72.3 U73.3 U74.3 U75.3 U76.3 U77.3 U78.3 U79.3 U80.3 U81.3 U82.3 U83.3 U84.3 U85.3 U86.3 U87.3 U88.3 U89.3 U90.3 U91.3 U92.3 U93.3 U94.3 U95.3 U96.3 U97.3 U98.3 U99.3 U100.3 U101.3 U102.3 U103.3 U104.3 U105.3 U106.3 U107.3 U108.3 U109.3 U110.3 U111.3 U112.3 U113.3 U114.3 U115.3 U116.3 U117.3 U118.3 U119.3 U120.3 U121.3 U122.3 U123.3 U124.3 U125.3 U126.3 U127.3 U128.3 U129.3 U130.3 U131.3 U132.3 U133.3 U134.3 U135.3 U136.3 U137.3 U138.3 U139.3 U140.3 U141.3 U142.3 U143.3 U144.3 U145.3 U146.3 U147.3 U148.3 U149.3 U150.3 U151.3 U152.3 U153.3 U154.3 U155.3 U156.3 U157.3 U158.3 U159.3 U160.3 U161.3 U162.3 U163.3 U164.3 U165.3 U166.3 U167.3 U168.3 U169.3 U170.3 U171.3 U172.3 U173.3 U174.3 U175.3 U176.3 U177.3 U178.3 U179.3 U180.3 | length 278
  Top Layer w1: v1(-100.985,1.763) U166.3 ; v1(-100.616,-8.803) U165.3 ; v1(-100.247,12.309) U167.3 ; v1(-99.144,-19.272) U164.3 ; v1(-98.411,22.72) U168.3 ; v1(-96.587,-29.53) U163.3 ; v1(-95.497,32.882) U169.3 ; v1(-92.971,-39.464) U162.3 ; v1(-91.537,42.684) U170.3 ; v1(-90.986,1.588) U106.3 ; v1(-90.654,-7.931) U105.3 ; v1(-90.322,11.09) U107.3 ; v1(-89.328,-17.364) U104.3 ; v1(-88.668,20.471) U108.3 ; v1(-88.337,-48.966) U161.3 ; v1(-87.024,-26.606) U103.3 ; v1(-86.574,52.019) U171.3 ; v1(-86.042,29.627) U109.3 ; v1(-83.766,-35.557) U102.3 ; v1(-82.734,-57.931) U160.3 ; v1(-82.474,38.458) U110.3 ; v1(-80.988,1.414) U46.3 ; v1(-80.692,-7.06) U45.3 ; v1(-80.662,60.783) U172.3 ; v1(-80.396,9.871) U47.3 ; v1(-79.59,-44.118) U101.3 ; v1(-79.512,-15.456) U44.3 ; v1(-78.924,18.221) U48.3 ; v1(-78.002,46.868) U111.3 ; v1(-77.461,-23.682) U43.3 ; v1(-76.587,26.371) U49.3 ; v1(-76.226,-66.262) U159.3 ; v1(-74.561,-31.649) U42.3 ; v1(-74.543,-52.195) U100.3 ; v1(-73.867,68.882) U173.3 ; v1(-73.411,34.232) U50.3 ; v1(-72.676,54.765) U112.3 ; v1(-70.844,-39.27) U41.3 ; v1(-69.431,41.718) U51.3 ; v1(-68.882,-73.867) U158.3 ; v1(-68.679,-59.701) U99.3 ; v1(-66.553,62.062) U113.3 ; v1(-66.351,-46.46) U40.3 ; v1(-66.262,76.226) U174.3 ; v1(-64.689,48.747) U52.3 ; v1(-62.062,-66.553) U98.3 ; v1(-61.131,-53.141) U39.3 ; v1(-60.783,-80.662) U157.3 ; v1(-59.701,68.679) U114.3 ; v1(-59.24,55.242) U53.3 ; v1(-57.931,82.734) U175.3 ; v1(-55.242,-59.24) U38.3 ; v1(-54.765,-72.676) U97.3 ; v1(-53.141,61.131) U54.3 ; v1(-52.195,74.543) U115.3 ; v1(-52.019,-86.574) U156.3 ; v1(-48.966,88.337) U176.3 ; v1(-48.747,-64.689) U37.3 ; v1(-46.868,-78.002) U96.3 ; v1(-46.46,66.351) U55.3 ; v1(-44.118,79.59) U116.3 ; v1(-42.684,-91.537) U155.3 ; v1(-41.718,-69.431) U36.3 ; v1(-39.464,92.971) U177.3 ; v1(-39.27,70.844) U56.3 ; v1(-38.458,-82.474) U95.3 ; v1(-35.557,83.766) U117.3 ; v1(-34.232,-73.411) U35.3 ; v1(-32.882,-95.497) U154.3 ; v1(-31.649,74.561) U57.3 ; v1(-29.627,-86.042) U94.3 ; v1(-29.53,96.587) U178.3 ; v1(-26.606,87.024) U118.3 ; v1(-26.371,-76.587) U34.3 ; v1(-23.682,77.461) U58.3 ; v1(-22.72,-98.411) U153.3 ; v1(-20.471,-88.668) U93.3 ; v1(-19.272,99.144) U179.3 ; v1(-18.221,-78.924) U33.3 ; v1(-17.364,89.328) U119.3 ; v1(-15.456,79.512) U59.3 ; v1(-12.309,-100.247) U152.3 ; v1(-11.09,-90.322) U92.3 ; U32.3 -9.689,-78.907 v1(-9.871,-80.396) ; v1(-8.803,100.616) U180.3 ; v1(-7.931,90.654) U120.3 ; v1(-7.06,80.692) U60.3 ; v1(-1.763,-100.985) U151.3 ; U31.3 v1(-1.414,-80.988) ; U91.3 v1(-1.588,-90.986) ; v1(1.414,80.988) U1.3 ; v1(1.588,90.986) U61.3 ; U121.3 v1(1.763,100.985) ; U30.3 v1(7.06,-80.692) ; U90.3 v1(7.931,-90.654) ; U150.3 v1(8.803,-100.616) ; v1(9.871,80.396) 9.871,78.92 U2.3 ; U62.3 v1(11.09,90.322) ; U122.3 v1(12.309,100.247) ; U29.3 v1(15.456,-79.512) ; U89.3 v1(17.364,-89.328) ; U3.3 v1(18.221,78.924) ; U149.3 v1(19.272,-99.144) ; U63.3 v1(20.471,88.668) ; U123.3 v1(22.72,98.411) ; U28.3 v1(23.682,-77.461) ; U88.3 v1(26.606,-87.024) ; U4.3 v1(26.371,76.587) ; U148.3 v1(29.53,-96.587) ; U64.3 v1(29.627,86.042) ; U27.3 v1(31.649,-74.561) ; U124.3 v1(32.882,95.497) ; U5.3 v1(34.232,73.411) ; U87.3 v1(35.557,-83.766) ; U65.3 v1(38.458,82.474) ; U26.3 v1(39.27,-70.844) ; U147.3 v1(39.464,-92.971) ; U6.3 v1(41.718,69.431) ; U125.3 v1(42.684,91.537) ; U86.3 v1(44.118,-79.59) ; U25.3 v1(46.46,-66.351) ; U66.3 v1(46.868,78.002) ; U7.3 v1(48.747,64.689) ; U146.3 v1(48.966,-88.337) ; U126.3 v1(52.019,86.574) ; U85.3 v1(52.195,-74.543) ; U24.3 v1(53.141,-61.131) ; U67.3 v1(54.765,72.676) ; U8.3 v1(55.242,59.24) ; U145.3 v1(57.931,-82.734) ; U23.3 v1(59.24,-55.242) ; U84.3 v1(59.701,-68.679) ; U127.3 v1(60.783,80.662) ; U9.3 v1(61.131,53.141) ; U68.3 v1(62.062,66.553) ; U22.3 v1(64.689,-48.747) ; U10.3 v1(66.351,46.46) ; U144.3 v1(66.262,-76.226) ; U83.3 v1(66.553,-62.062) ; U69.3 v1(68.679,59.701) ; U128.3 v1(68.882,73.867) ; U21.3 v1(69.431,-41.718) ; U11.3 v1(70.844,39.27) ; U82.3 v1(72.676,-54.765) ; U20.3 v1(73.411,-34.232) ; U143.3 v1(73.867,-68.882) ; U12.3 v1(74.561,31.649) ; U70.3 v1(74.543,52.195) ; U129.3 v1(76.226,66.262) ; U19.3 v1(76.587,-26.371) ; U13.3 v1(77.461,23.682) ; U81.3 v1(78.002,-46.868) ; U18.3 v1(78.924,-18.221) ; U14.3 v1(79.512,15.456) ; U71.3 v1(79.59,44.118) ; U17.3 v1(80.396,-9.871) ; U15.3 v1(80.692,7.06) ; U16.3 v1(80.988,-1.414) ; U142.3 v1(80.662,-60.783) ; U80.3 v1(82.474,-38.458) ; U130.3 v1(82.734,57.931) ; U72.3 v1(83.766,35.557) ; U79.3 v1(86.042,-29.627) ; U141.3 v1(86.574,-52.019) ; U73.3 v1(87.024,26.606) ; U131.3 v1(88.337,48.966) ; U78.3 v1(88.668,-20.471) ; U74.3 v1(89.328,17.364) ; U77.3 v1(90.322,-11.09) ; U75.3 v1(90.654,7.931) ; U76.3 v1(90.986,-1.588) ; U140.3 v1(91.537,-42.684) ; U132.3 v1(92.971,39.464) ; U139.3 v1(95.497,-32.882) ; U133.3 v1(96.587,29.53) ; U138.3 v1(98.411,-22.72) ; U134.3 v1(99.144,19.272) ; U137.3 v1(100.247,-12.309) ; U135.3 v1(100.616,8.803) ; U136.3 v1(100.985,-1.763)
NetR1_1: R1.1 U16.4 | length 4.1
  Top Layer w1: v1(79.391,4.161) 79.391,1.716 U16.4
  Bottom Layer w1: R1.1 77.938,4.161 v1(79.391,4.161)
NetR1_2: R1.2 U15.2 | length 3.8
  Top Layer w1: U15.2 74.398,6.065 v1(74.398,3.899)
  Bottom Layer w1: v1(74.398,3.899) 75.851,3.899 R1.2
NetR2_1: R2.1 U31.4 | length 4.1
  Top Layer w1: U31.4 v1(4.161,-79.391)
  Bottom Layer w1: R2.1 v1(4.161,-79.391)
NetR2_2: R2.2 U30.2 | length 3.8
  Top Layer w1: v1(3.899,-74.398) U30.2
  Bottom Layer w1: v1(3.899,-74.398) R2.2
NetR3_1: R3.1 U46.4 | length 4.1
  Top Layer w1: U46.4 v1(-79.391,-4.161)
  Bottom Layer w1: v1(-79.391,-4.161) R3.1
NetR3_2: R3.2 U45.2 | length 3.8
  Top Layer w1: v1(-74.398,-3.899) U45.2
  Bottom Layer w1: R3.2 v1(-74.398,-3.899)
NetR4_1: R4.1 U60.2 | length 7.1
  Top Layer w1: U60.2 v1(-4.108,78.392)
  Bottom Layer w1: R4.1 v1(-4.108,78.392)
NetR4_2: R4.2 U61.4 | length 7.5
  Top Layer w1: v1(-4.475,85.383) U61.4
  Bottom Layer w1: v1(-4.475,85.383) R4.2
NetR5_1: R5.1 U76.4 | length 4.6
  Top Layer w1: v1(89.377,4.684) U76.4
  Bottom Layer w1: R5.1 v1(89.377,4.684)
NetR5_2: R5.2 U75.2 | length 4.3
  Top Layer w1: U75.2 v1(84.384,4.422)
  Bottom Layer w1: v1(84.384,4.422) R5.2
NetR6_1: R6.1 U91.4 | length 4.6
  Top Layer w1: U91.4 v1(4.684,-89.377)
  Bottom Layer w1: R6.1 v1(4.684,-89.377)
NetR6_2: R6.2 U90.2 | length 4.4
  Top Layer w1: v1(4.422,-84.384) U90.2
  Bottom Layer w1: v1(4.422,-84.384) R6.2
NetR7_1: R7.1 U106.4 | length 4.6
  Top Layer w1: U106.4 v1(-89.377,-4.684)
  Bottom Layer w1: v1(-89.377,-4.684) R7.1
NetR7_2: R7.2 U105.2 | length 4.3
  Top Layer w1: v1(-84.384,-4.422) U105.2
  Bottom Layer w1: R7.2 v1(-84.384,-4.422)
NetR8_1: R8.1 U120.2 | length 7.4
  Top Layer w1: U120.2 v1(-4.632,88.379)
  Bottom Layer w1: R8.1 v1(-4.632,88.379)
NetR8_2: R8.2 U121.4 | length 7.8
  Top Layer w1: v1(-4.998,95.369) U121.4
  Bottom Layer w1: v1(-4.998,95.369) R8.2
NetR9_1: R9.1 U136.4 | length 5.1
  Top Layer w1: v1(99.364,5.207) U136.4
  Bottom Layer w1: R9.1 v1(99.364,5.207)
NetR9_2: R9.2 U135.2 | length 4.9
  Top Layer w1: U135.2 v1(94.37,4.946)
  Bottom Layer w1: v1(94.37,4.946) R9.2
NetR10_1: R10.1 U151.4 | length 5.1
  Top Layer w1: U151.4 v1(5.207,-99.364)
  Bottom Layer w1: R10.1 v1(5.207,-99.364)
NetR10_2: R10.2 U150.2 | length 4.9
  Top Layer w1: v1(4.946,-94.37) U150.2
  Bottom Layer w1: v1(4.946,-94.37) R10.2
NetR11_1: R11.1 U166.4 | length 5.1
  Top Layer w1: U166.4 v1(-99.364,-5.207)
  Bottom Layer w1: v1(-99.364,-5.207) R11.1
NetR11_2: R11.2 U165.2 | length 4.9
  Top Layer w1: v1(-94.37,-4.946) U165.2
  Bottom Layer w1: R11.2 v1(-94.37,-4.946)
NetU1_2: U1.2 U2.4 | length 6.8
  Top Layer w1: U1.2 U2.4
NetU2_2: U2.2 U3.4 | length 6.8
  Top Layer w1: U2.2@9.453,74 U3.4
NetU3_2: U3.2 U4.4 | length 6.8
  Top Layer w1: U3.2 U4.4
NetU4_2: U4.2 U5.4 | length 6.8
  Top Layer w1: U4.2 U5.4
NetU5_2: U5.2 U6.4 | length 6.8
  Top Layer w1: U5.2@31.854,67.452 U6.4
NetU6_2: U6.2 U7.4 | length 6.8
  Top Layer w1: U6.2 U7.4
NetU7_2: U7.2 U8.4 | length 6.8
  Top Layer w1: U7.2 U8.4
NetU8_2: U8.2 U9.4 | length 6.8
  Top Layer w1: U8.2 U9.4
NetU9_2: U9.2 U10.4 | length 6.9
  Top Layer w1: U9.2 U10.4
NetU10_2: U10.2 U11.4 | length 6.9
  Top Layer w1: U10.2 U11.4
NetU11_2: U11.2 U12.4 | length 6.9
  Top Layer w1: U11.2 U12.4
NetU12_2: U12.2 U13.4 | length 6.9
  Top Layer w1: U12.2 U13.4
NetU13_2: U13.2 U14.4 | length 6.9
  Top Layer w1: U13.2 U14.4
NetU14_2: U14.2 U15.4 | length 6.8
  Top Layer w1: U14.2 U15.4
NetU16_2: U16.2 U17.4 | length 6.8
  Top Layer w1: U16.2 U17.4
NetU17_2: U17.2 U18.4 | length 6.9
  Top Layer w1: U17.2 U18.4
NetU18_2: U18.2 U19.4 | length 6.8
  Top Layer w1: U18.2 U19.4
NetU19_2: U19.2 U20.4 | length 6.9
  Top Layer w1: U19.2 U20.4
NetU20_2: U20.2 U21.4 | length 6.9
  Top Layer w1: U20.2 U21.4
NetU21_2: U21.2 U22.4 | length 6.9
  Top Layer w1: U21.2 U22.4
NetU22_2: U22.2 U23.4 | length 6.9
  Top Layer w1: U22.2 U23.4
NetU23_2: U23.2 U24.4 | length 6.9
  Top Layer w1: U23.2 U24.4
NetU24_2: U24.2 U25.4 | length 6.9
  Top Layer w1: U25.4 U24.2
NetU25_2: U25.2 U26.4 | length 7
  Top Layer w1: U26.4 U25.2
NetU26_2: U26.2 U27.4 | length 6.9
  Top Layer w1: U27.4 U26.2
NetU27_2: U27.2 U28.4 | length 6.9
  Top Layer w1: U28.4 U27.2
NetU28_2: U28.2 U29.4 | length 6.9
  Top Layer w1: U29.4 U28.2
NetU29_2: U29.2 U30.4 | length 6.9
  Top Layer w1: U30.4 U29.2
NetU31_2: U31.2 U32.4 | length 6.8
  Top Layer w1: U32.4 U31.2
NetU32_2: U32.2 U33.4 | length 6.8
  Top Layer w1: U33.4 U32.2
NetU33_2: U33.2 U34.4 | length 6.9
  Top Layer w1: U34.4 U33.2
NetU34_2: U34.2 U35.4 | length 6.8
  Top Layer w1: U35.4 U34.2
NetU35_2: U35.2 U36.4 | length 6.8
  Top Layer w1: U36.4 U35.2
NetU36_2: U36.2 U37.4 | length 6.8
  Top Layer w1: U37.4 U36.2
NetU37_2: U37.2 U38.4 | length 6.8
  Top Layer w1: U38.4 U37.2
NetU38_2: U38.2 U39.4 | length 6.8
  Top Layer w1: U39.4 U38.2
NetU39_2: U39.2 U40.4 | length 6.8
  Top Layer w1: U40.4 U39.2
NetU40_2: U40.2 U41.4 | length 6.8
  Top Layer w1: U41.4 U40.2
NetU41_2: U41.2 U42.4 | length 6.8
  Top Layer w1: U42.4 U41.2
NetU42_2: U42.2 U43.4 | length 6.8
  Top Layer w1: U43.4 U42.2
NetU43_2: U43.2 U44.4 | length 6.8
  Top Layer w1: U44.4 U43.2
NetU44_2: U44.2 U45.4 | length 6.9
  Top Layer w1: U45.4 U44.2
NetU46_2: U46.2 U47.4 | length 6.9
  Top Layer w1: U47.4 U46.2
NetU47_2: U47.2 U48.4 | length 6.9
  Top Layer w1: U48.4 U47.2
NetU48_2: U48.2 U49.4 | length 7
  Top Layer w1: U49.4 U48.2
NetU49_2: U49.2 U50.4 | length 7
  Top Layer w1: U50.4 U49.2
NetU50_2: U50.2 U51.4 | length 7
  Top Layer w1: U51.4 U50.2
NetU51_2: U51.2 U52.4 | length 6.9
  Top Layer w1: U52.4 U51.2
NetU52_2: U52.2 U53.4 | length 6.9
  Top Layer w1: U53.4 U52.2
NetU53_2: U53.2 U54.4 | length 6.8
  Top Layer w1: U54.4 U53.2
NetU54_2: U54.2 U55.4 | length 6.7
  Top Layer w1: U54.2 U55.4
NetU55_2: U55.2 U56.4 | length 6.8
  Top Layer w1: U55.2 U56.4
NetU56_2: U56.2 U57.4 | length 6.7
  Top Layer w1: U56.2 U57.4
NetU57_2: U57.2 U58.4 | length 6.8
  Top Layer w1: U57.2 U58.4
NetU58_2: U58.2 U59.4 | length 6.8
  Top Layer w1: U58.2 U59.4
NetU59_2: U59.2 U60.4 | length 6.8
  Top Layer w1: U59.2 U60.4
NetU61_2: U61.2 U62.4 | length 7.5
  Top Layer w1: U61.2 U62.4
NetU62_2: U62.2 U63.4 | length 7.6
  Top Layer w1: U62.2 U63.4
NetU63_2: U63.2 U64.4 | length 7.5
  Top Layer w1: U63.2 U64.4
NetU64_2: U64.2 U65.4 | length 7.5
  Top Layer w1: U64.2 U65.4
NetU65_2: U65.2 U66.4 | length 7.5
  Top Layer w1: U65.2 U66.4
NetU66_2: U66.2 U67.4 | length 7.5
  Top Layer w1: U66.2 U67.4
NetU67_2: U67.2 U68.4 | length 7.6
  Top Layer w1: U67.2 U68.4
NetU68_2: U68.2 U69.4 | length 7.5
  Top Layer w1: U68.2 U69.4
NetU69_2: U69.2 U70.4 | length 7.5
  Top Layer w1: U69.2 U70.4
NetU70_2: U70.2 U71.4 | length 7.6
  Top Layer w1: U70.2 U71.4
NetU71_2: U71.2 U72.4 | length 7.6
  Top Layer w1: U71.2 U72.4
NetU72_2: U72.2 U73.4 | length 7.5
  Top Layer w1: U72.2 U73.4
NetU73_2: U73.2 U74.4 | length 7.6
  Top Layer w1: U73.2 U74.4
NetU74_2: U74.2 U75.4 | length 7.6
  Top Layer w1: U74.2 U75.4
NetU76_2: U76.2 U77.4 | length 7.7
  Top Layer w1: U76.2 U77.4
NetU77_2: U77.2 U78.4 | length 7.6
  Top Layer w1: U77.2 U78.4
NetU78_2: U78.2 U79.4 | length 7.6
  Top Layer w1: U78.2 U79.4
NetU79_2: U79.2 U80.4 | length 7.6
  Top Layer w1: U79.2 U80.4
NetU80_2: U80.2 U81.4 | length 7.6
  Top Layer w1: U80.2 U81.4
NetU81_2: U81.2 U82.4 | length 7.7
  Top Layer w1: U81.2 U82.4
NetU82_2: U82.2 U83.4 | length 7.6
  Top Layer w1: U82.2 U83.4
NetU83_2: U83.2 U84.4 | length 7.6
  Top Layer w1: U84.4 U83.2
NetU84_2: U84.2 U85.4 | length 7.7
  Top Layer w1: U85.4 U84.2
NetU85_2: U85.2 U86.4 | length 7.7
  Top Layer w1: U86.4 U85.2
NetU86_2: U86.2 U87.4 | length 7.7
  Top Layer w1: U87.4 U86.2
NetU87_2: U87.2 U88.4 | length 7.6
  Top Layer w1: U88.4 U87.2
NetU88_2: U88.2 U89.4 | length 7.7
  Top Layer w1: U89.4 U88.2
NetU89_2: U89.2 U90.4 | length 7.8
  Top Layer w1: U90.4 U89.2
NetU91_2: U91.2 U92.4 | length 7.6
  Top Layer w1: U92.4 U91.2
NetU92_2: U92.2 U93.4 | length 7.6
  Top Layer w1: U93.4 U92.2
NetU93_2: U93.2 U94.4 | length 7.6
  Top Layer w1: U94.4 U93.2
NetU94_2: U94.2 U95.4 | length 7.5
  Top Layer w1: U95.4 U94.2
NetU95_2: U95.2 U96.4 | length 7.5
  Top Layer w1: U96.4 U95.2
NetU96_2: U96.2 U97.4 | length 7.6
  Top Layer w1: U97.4 U96.2
NetU97_2: U97.2 U98.4 | length 7.6
  Top Layer w1: U98.4 U97.2
NetU98_2: U98.2 U99.4 | length 7.5
  Top Layer w1: U99.4 U98.2
NetU99_2: U99.2 U100.4 | length 7.6
  Top Layer w1: U100.4 U99.2
NetU100_2: U100.2 U101.4 | length 7.6
  Top Layer w1: U101.4 U100.2
NetU101_2: U101.2 U102.4 | length 7.6
  Top Layer w1: U102.4 U101.2
NetU102_2: U102.2 U103.4 | length 7.6
  Top Layer w1: U103.4 U102.2
NetU103_2: U103.2 U104.4 | length 7.6
  Top Layer w1: U104.4 U103.2
NetU104_2: U104.2 U105.4 | length 7.6
  Top Layer w1: U105.4 U104.2
NetU106_2: U106.2 U107.4 | length 7.6
  Top Layer w1: U107.4 U106.2
NetU107_2: U107.2 U108.4 | length 7.6
  Top Layer w1: U108.4 U107.2
NetU108_2: U108.2 U109.4 | length 7.6
  Top Layer w1: U109.4 U108.2
NetU109_2: U109.2 U110.4 | length 7.6
  Top Layer w1: U110.4 U109.2
NetU110_2: U110.2 U111.4 | length 8.2
  Top Layer w1: U111.4 U110.2
NetU111_2: U111.2 U112.4 | length 7.1
  Top Layer w1: U112.4 U111.2
NetU112_2: U112.2 U113.4 | length 7.6
  Top Layer w1: U113.4 U112.2
NetU113_2: U113.2 U114.4 | length 7.5
  Top Layer w1: U113.2 U114.4
NetU114_2: U114.2 U115.4 | length 7.5
  Top Layer w1: U114.2 U115.4
NetU115_2: U115.2 U116.4 | length 7.5
  Top Layer w1: U115.2 U116.4
NetU116_2: U116.2 U117.4 | length 7.5
  Top Layer w1: U116.2 U117.4
NetU117_2: U117.2 U118.4 | length 7.5
  Top Layer w1: U117.2 U118.4
NetU118_2: U118.2 U119.4 | length 7.5
  Top Layer w1: U118.2 U119.4
NetU119_2: U119.2 U120.4 | length 7.5
  Top Layer w1: U119.2 U120.4
NetU121_2: U121.2 U122.4 | length 8.4
  Top Layer w1: U121.2 U122.4
NetU122_2: U122.2 U123.4 | length 8.4
  Top Layer w1: U122.2 U123.4
NetU123_2: U123.2 U124.4 | length 8.4
  Top Layer w1: U123.2 U124.4
NetU124_2: U124.2 U125.4 | length 8.7
  Top Layer w1: U124.2 U125.4
NetU125_2: U125.2 U126.4 | length 8
  Top Layer w1: U125.2 U126.4
NetU126_2: U126.2 U127.4 | length 8.4
  Top Layer w1: U126.2 U127.4
NetU127_2: U127.2 U128.4 | length 8.5
  Top Layer w1: U127.2 U128.4
NetU128_2: U128.2 U129.4 | length 8.4
  Top Layer w1: U128.2 U129.4
NetU129_2: U129.2 U130.4 | length 8.4
  Top Layer w1: U129.2 U130.4
NetU130_2: U130.2 U131.4 | length 8.4
  Top Layer w1: U130.2 U131.4
NetU131_2: U131.2 U132.4 | length 8.4
  Top Layer w1: U131.2 U132.4
NetU132_2: U132.2 U133.4 | length 8.4
  Top Layer w1: U132.2 U133.4
NetU133_2: U133.2 U134.4 | length 8.4
  Top Layer w1: U133.2 U134.4
NetU134_2: U134.2 U135.4 | length 8.4
  Top Layer w1: U134.2 U135.4
NetU136_2: U136.2 U137.4 | length 8.5
  Top Layer w1: U136.2 U137.4
NetU137_2: U137.2 U138.4 | length 8.5
  Top Layer w1: U137.2 U138.4
NetU138_2: U138.2 U139.4 | length 8.4
  Top Layer w1: U138.2 U139.4
NetU139_2: U139.2 U140.4 | length 8.4
  Top Layer w1: U139.2 U140.4
NetU140_2: U140.2 U141.4 | length 8.5
  Top Layer w1: U140.2 U141.4
NetU141_2: U141.2 U142.4 | length 8.5
  Top Layer w1: U141.2 U142.4
NetU142_2: U142.2 U143.4 | length 8.4
  Top Layer w1: U143.4 U142.2
NetU143_2: U143.2 U144.4 | length 8.5
  Top Layer w1: U144.4 U143.2
NetU144_2: U144.2 U145.4 | length 8.5
  Top Layer w1: U145.4 U144.2
NetU145_2: U145.2 U146.4 | length 8.4
  Top Layer w1: U146.4 U145.2
NetU146_2: U146.2 U147.4 | length 8.4
  Top Layer w1: U147.4 U146.2
NetU147_2: U147.2 U148.4 | length 8.5
  Top Layer w1: U148.4 U147.2
NetU148_2: U148.2 U149.4 | length 8.5
  Top Layer w1: U149.4 U148.2
NetU149_2: U149.2 U150.4 | length 8.5
  Top Layer w1: U150.4 U149.2
NetU151_2: U151.2 U152.4 | length 8.4
  Top Layer w1: U152.4 U151.2
NetU152_2: U152.2 U153.4 | length 8.4
  Top Layer w1: U153.4 U152.2
NetU153_2: U153.2 U154.4 | length 8.4
  Top Layer w1: U154.4 U153.2
NetU154_2: U154.2 U155.4 | length 8.4
  Top Layer w1: U155.4 U154.2
NetU155_2: U155.2 U156.4 | length 8.3
  Top Layer w1: U156.4 U155.2
NetU156_2: U156.2 U157.4 | length 8.3
  Top Layer w1: U157.4 U156.2
NetU157_2: U157.2 U158.4 | length 8.4
  Top Layer w1: U158.4 U157.2
NetU158_2: U158.2 U159.4 | length 8.4
  Top Layer w1: U159.4 U158.2
NetU159_2: U159.2 U160.4 | length 8.5
  Top Layer w1: U160.4 U159.2
NetU160_2: U160.2 U161.4 | length 8.4
  Top Layer w1: U161.4 U160.2
NetU161_2: U161.2 U162.4 | length 8.4
  Top Layer w1: U162.4 U161.2
NetU162_2: U162.2 U163.4 | length 8.5
  Top Layer w1: U163.4 U162.2
NetU163_2: U163.2 U164.4 | length 8.4
  Top Layer w1: U164.4 U163.2
NetU164_2: U164.2 U165.4 | length 8.4
  Top Layer w1: U165.4 U164.2
NetU166_2: U166.2 U167.4 | length 8.5
  Top Layer w1: U167.4 U166.2
NetU167_2: U167.2 U168.4 | length 8.5
  Top Layer w1: U168.4 U167.2
NetU168_2: U168.2 U169.4 | length 8.4
  Top Layer w1: U169.4 U168.2
NetU169_2: U169.2 U170.4 | length 8.5
  Top Layer w1: U170.4 U169.2
NetU170_2: U170.2 U171.4 | length 8.5
  Top Layer w1: U171.4 U170.2
NetU171_2: U171.2 U172.4 | length 8.4
  Top Layer w1: U172.4 U171.2
NetU172_2: U172.2 U173.4 | length 8.4
  Top Layer w1: U172.2 U173.4
NetU173_2: U173.2 U174.4 | length 8.3
  Top Layer w1: U173.2 U174.4
NetU174_2: U174.2 U175.4 | length 8.3
  Top Layer w1: U174.2 U175.4
NetU175_2: U175.2 U176.4 | length 8.4
  Top Layer w1: U175.2 U176.4
NetU176_2: U176.2 U177.4 | length 8.3
  Top Layer w1: U176.2 U177.4
NetU177_2: U177.2 U178.4 | length 8.3
  Top Layer w1: U177.2 U178.4
NetU178_2: U178.2 U179.4 | length 8.3
  Top Layer w1: U178.2 U179.4
NetU179_2: U179.2 U180.4 | length 8.4
  Top Layer w1: U179.2 U180.4

## Polygon pours and split planes (outlines as drawn)
GND on Bottom Layer "Top Layer-No Net" (solid, remove dead copper, pour order 6): -104.5,0 ccw(c0,0) 0,-104.5 ccw(c0,0) 104.5,0 ccw(c0,0) 0,104.5 ccw(c0,0)
5V on Top Layer "Top Layer-No Net1" (solid, remove dead copper, pour order 8): -104.5,0 ccw(c0,0) 0,-104.5 ccw(c0,0) 104.5,0 ccw(c0,0) 0,104.5 ccw(c0,0)

## Silkscreen, mask and mechanical layers (free items; w line width, h text height)
Bottom Overlay:
  text "DIN" at -2.513,71.956 h1
  text "DOUT" at -7.526,71.606 h1 r6
  text "GND" at 7.526,71.606 h1 r356
  text "5V_10A" at 16.196,70.155 h1 r350
  text "NPSC_rings v1.0" at 8.531,-69.478 h1
  text "Othniel Konan ECE 2017" at 11.42,-72.101 h1
Mechanical 1:
  circle w0.254: c0,0 r67
  lines w0.254: -92.632,-49.44 ccw(c-90.933,-52.5) -89.132,-55.501 ccw(c0,0) -55.502,-89.132 ; -92.632,49.44 ccw(c0,0) -92.631,-49.443 ; -92.629,49.439 cw(c-90.933,52.5) -89.241,55.564 ; -89.135,55.498 cw(c0,0) -55.498,89.135 ; -55.564,-89.241 ccw(c-52.5,-90.933) -49.439,-92.629 ; -55.564,89.241 cw(c-52.5,90.933) -49.486,92.713 ; -49.443,92.631 cw(c0,0) 49.44,92.632 ; -49.44,-92.632 ccw(c0,0) 49.44,-92.632 ; 49.439,-92.629 ccw(c52.5,-90.933) 55.484,-89.104 ; 49.439,92.629 cw(c52.5,90.933) 55.5,89.13 ; 55.502,-89.132 ccw(c0,0) 89.045,-55.642 ; 55.502,89.132 cw(c0,0) 89.132,55.502 cw(c90.933,52.5) 92.632,49.44 cw(c0,0) 92.632,-49.44 ; 89.104,-55.484 ccw(c90.933,-52.5) 92.603,-49.424